# Altium PCB TDA7850.PcbDoc
Units mm, origin at the board's own origin, x right, y up, seen from the top; angles counter-clockwise.
Board outline 60.58 x 24.89 mm, 2 copper layers (Top Layer, Bottom Layer); 17 components, 18 nets, 76 pads, 0 vias.
Unrouted connection lines stored in the file: 13.
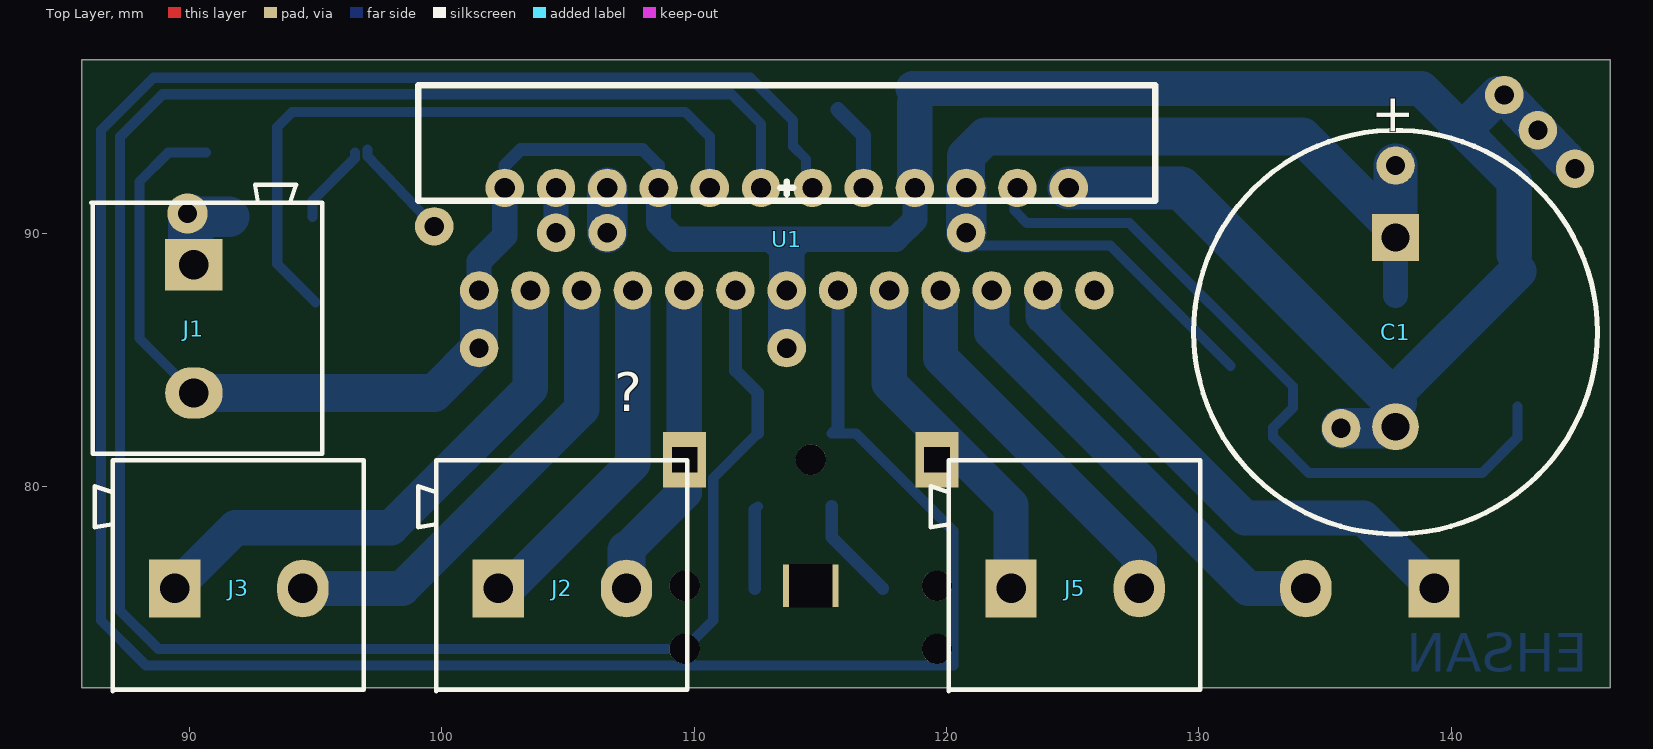
[diagram p0: Top Layer view]
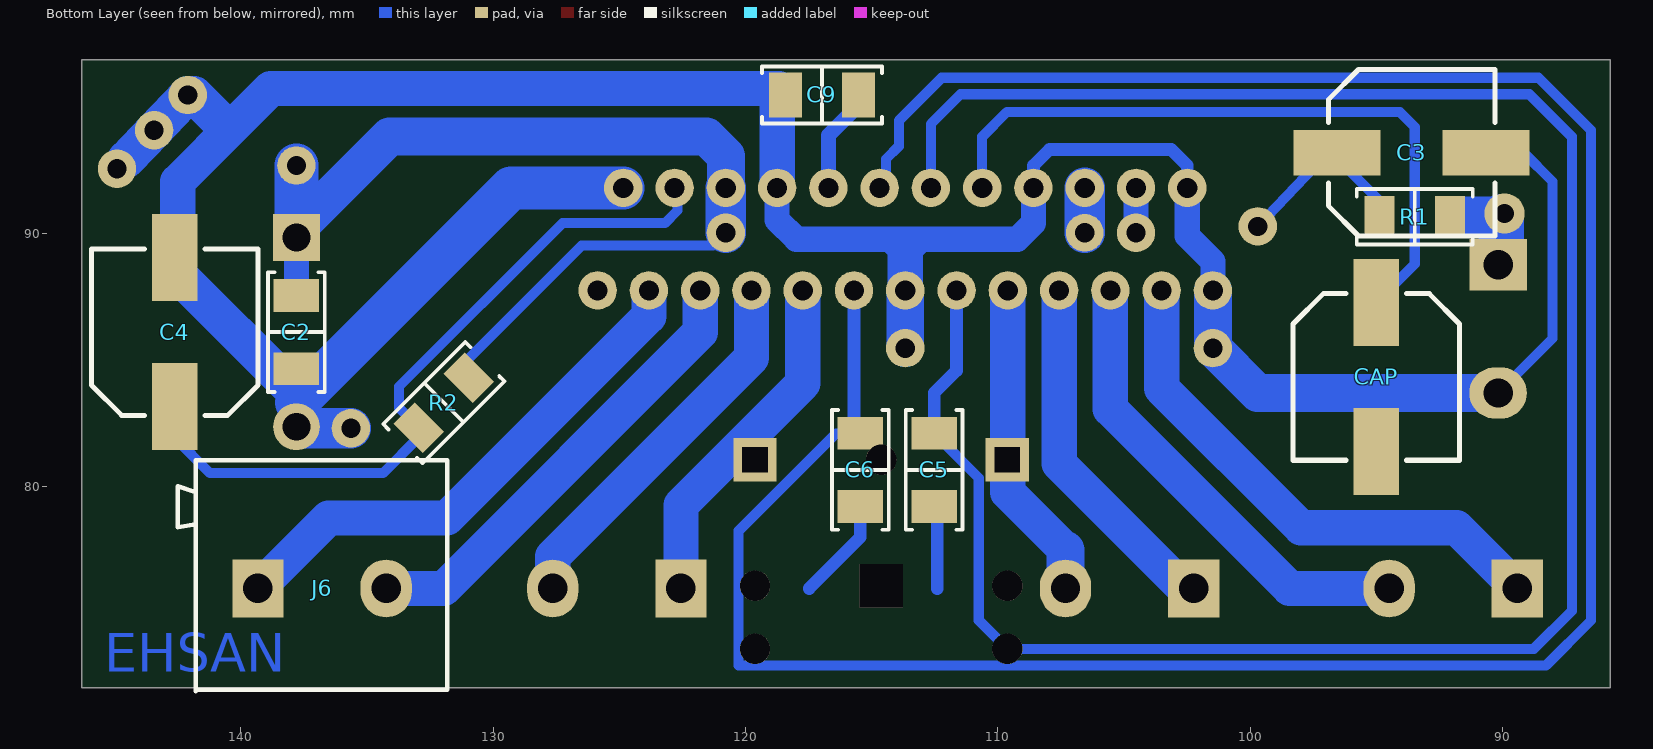
[diagram p1: Bottom Layer view, seen from below]
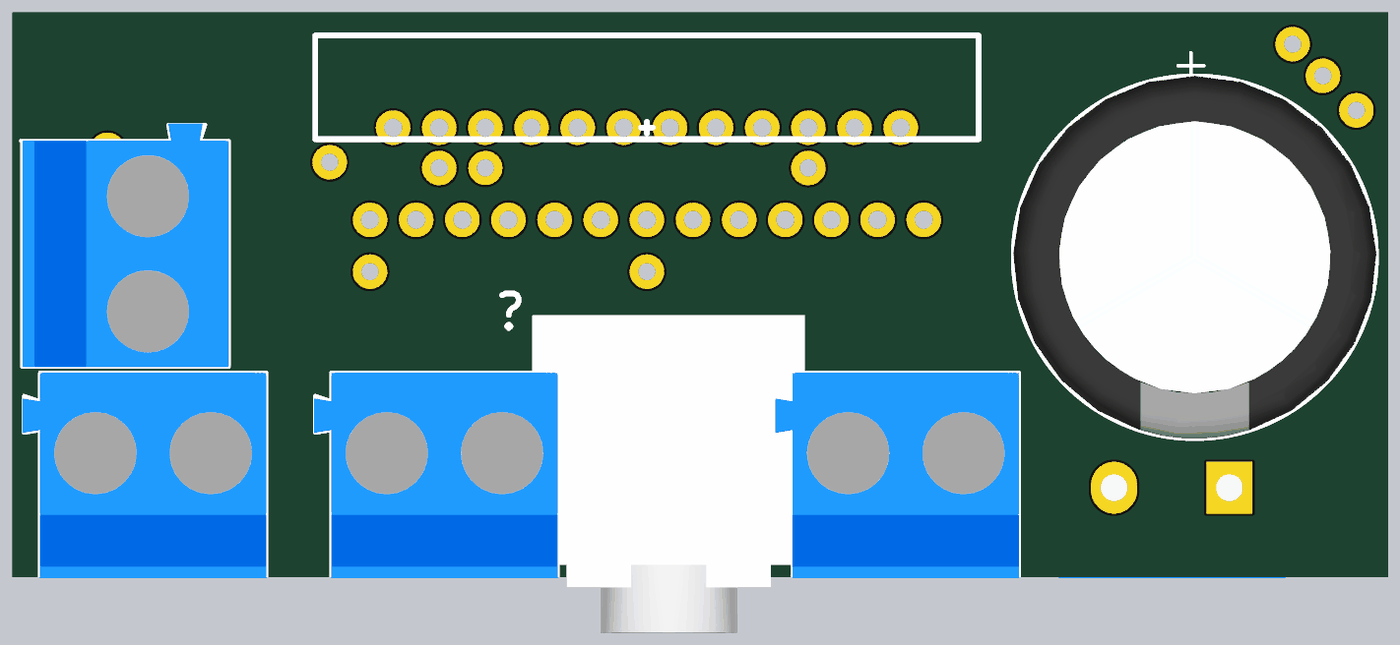
[diagram p2: 3D render of the assembled board from above, using the file's embedded part models]
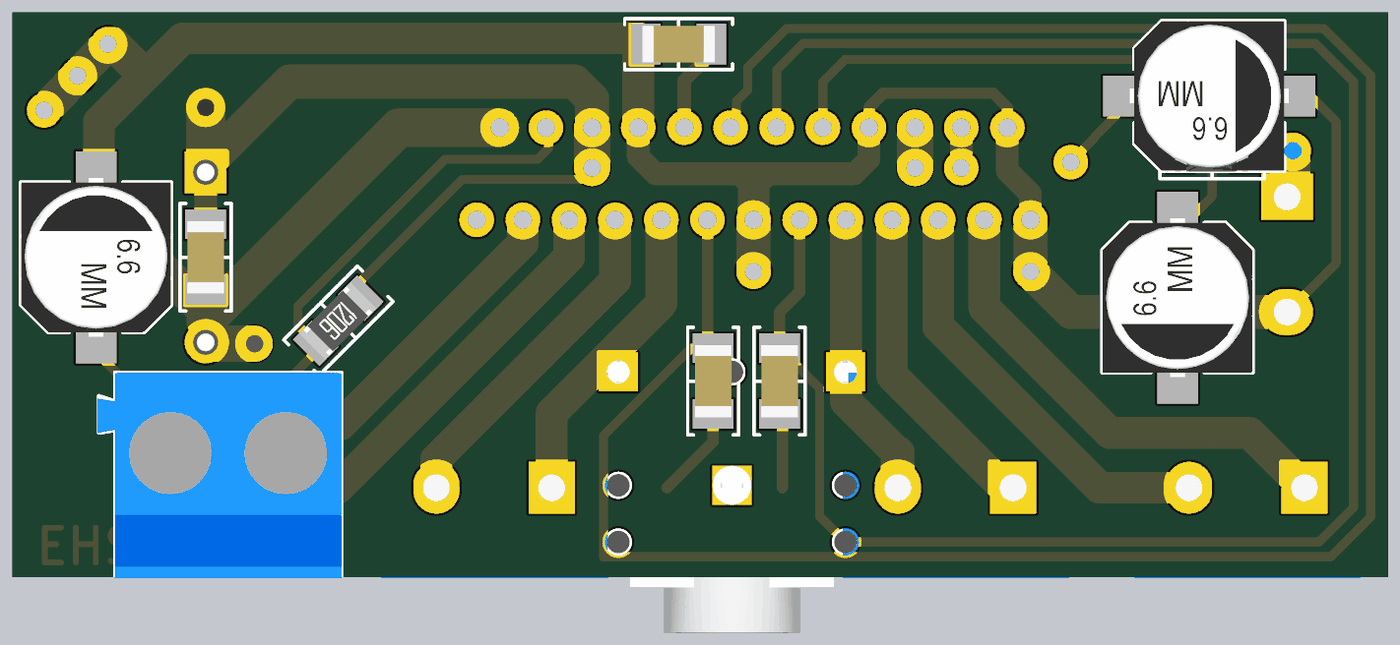
[diagram p3: 3D render of the assembled board from below, using the file's embedded part models]

## Layer stack, top to bottom
Top Solder: solder mask 0.0102, Solder Resist, Dk 3.5
Top Layer: signal copper 0.0356
Dielectric1: dielectric 0.32, FR-4, Dk 4.8
Bottom Layer: signal copper 0.0356
Bottom Solder: solder mask 0.0102, Solder Resist, Dk 3.5

## Board outline
85.725,72.009 146.304,72.009 146.304,96.901 85.725,96.901

## Design rules (kind name [scope] priority, off if disabled: settings)
Clearance [All] p1: gap=0.254 ignorepadtopadclearanceinfootprint=FALSE except(0: Arc-Hole Track-Hole SMDPad-Hole THPad-Hole Via-Hole Fill-Hole Poly-Hole Region-Hole Text-Hole)
PolygonConnect [All] p1: connectstyle=Relief reliefconductorwidth=0.254 reliefentries=4 polygonreliefangle="90 Angle" airgapwidth=0.254
RoomDefinition AF [InComponentClass('AF')] p1: confinementstyle=ConfineIn formatcopy=TRUE lockcomponents=FALSE outline 147.447,73.533 161.925,73.533 161.925,89.154 147.447,89.154
RoutingVias [All] p1: holewidth=0.711 width=1.27 viastyle="Through Hole" minholewidth=0.711 minwidth=1.27 maxholewidth=0.711 maxwidth=1.27
SolderMaskExpansion [All] p1: expansion=0.102
Width [All] p1: maxlimit=0.4 minlimit=0.4 preferedwidth=0.4
30 further rules are at their usual default settings.

## Components (designator, comment, footprint, x,y, rotation, side; value= is the part's Value field where it differs from the comment)
? "3.5 mm Right-Angle Stereo Jack, 4 Pin PCB Mount, Isolated Ground" "3.5mm jack" 114.62,76.052 r90 top
C1 "2000uF-16V" Cap_5_(7.5mm) 137.795,86.106 r270 top value=10uF
C2 "100nF" "CAP 1206/3216" 137.795,86.106 r90 bottom value=0.1uF
C3 "1uF" "CAP ALUM 6.6MM" 93.599,93.218 r180 bottom value=10uF
C4 "1uF" "CAP ALUM 6.6MM" 142.621,86.106 r90 bottom value=10uF
C5 "220nF" "CAP 1206/3216" 112.522,80.645 r90 bottom value=0.1uF
C6 "220Nf" "CAP 1206/3216" 115.443,80.645 r90 bottom value=0.1uF
C9 "470NF" "CAP 1206/3216" 116.967,95.504 r180 bottom value=0.1uF
CAP "1UF" "CAP ALUM 6.6MM" 94.996,84.328 r270 bottom value=10uF
J1 "2 Pin" Socket_Blue_2 90.17,86.233 r270 top
J2 "2 Pin" Socket_Blue_2 104.775,75.946 r0 top
J3 "2 Pin" Socket_Blue_2 91.948,75.946 r0 top
J5 "2 Pin" Socket_Blue_2 125.095,75.946 r0 top
J6 "2 Pin" Socket_Blue_2 136.779,75.946 r180 bottom
R1 "10k" "RES 1206/3216" 93.472,90.678 r0 bottom value=1K
R2 "47k" "RES 1206/3216" 131.953,83.312 r315 bottom value=1K
U1 "TDA7388" TDA7388 113.665,89.916 r0 top

## Footprints (in the part's own frame and the unit in brackets; to place one, negate y for a bottom-side part, rotate by r counter-clockwise, add the part's x,y. Pads: shape width x height; smd on the part's side, far side on the other; paste and mask are expansions set on the pad)
"3.5mm jack" [mm]
  round 1.2 hole 1.2 unplated: 1(-2.5,5) 1(-2.5,-5) 1(0,5) 1(0,-5) 1(5,0)
  rect 1.7x2.2 / inner rect 1.524x1.524 / far side rect 1.722x1.722 hole 1.7 square: 1(0,0)
  rect 2.2x1.7 / inner rect 1.524x1.524 / far side rect 1.722x1.722 hole 1 square: 2(5,-5) 3(5,5)
  body extent -6.55,-6 7.5,6, height 6
"CAP 1206/3216" [mm] "Chip Capacitor, 2-Leads, Body 3.25x1.60mm, IPC Medium Density"
  rect 1.3x1.8 smd: 1(-1.45,0) 2(1.45,0)
  silkscreen extent -2.37,-1.12 2.37,1.12, body extent -1.6,-0.81 1.6,0.81, height 1.62
"CAP ALUM 6.6MM" [mm] "Aluminum Electrolytic Capacitor, Body 6.60x6.60x7.70mm, IPC Low Density"
  rect 3.45x1.8 smd: 1(-2.95,0) 2(2.95,0)
  silkscreen extent -3.3,-3.3 3.3,3.3, body extent -3.5,-3.3 3.5,3.3, height 7.7
Cap_5_(7.5mm) [mm] "Capacitor, Electrolytic, Radial; Body 16 x 25 mm (Dia.xH typ); Pin Spacing 7.5 mm (typ)"
  rect 1.85x1.85 hole 1.1: 1(-3.75,0)
  round 1.85 hole 1.1: 2(3.75,0)
  silkscreen extent -8,-8 8,8, body extent -8,-8 8,8, height 41
"RES 1206/3216" [mm] "Chip Resistor, 2-Leads, Body 3.13x1.55mm, IPC Medium Density"
  rect 1.2x1.65 smd: 1(-1.4,0) 2(1.4,0)
  silkscreen extent -2.3,-1.1 2.3,1.1, body extent -1.58,-0.8 1.62,0.8, height 0.6
Socket_Blue_2 [mil]
  rect 80x90 hole 46: 1(-100,0)
  oval 80x90 hole 46: 2(100,0)
  silkscreen extent -225,-160 195,200, body extent -227,-157 195,200, height 493
TDA7388 [mil]
  round 60 hole 31.5: 1(-480,-85) 2(-440,75) 3(-400,-85) 4(-360,75) 5(-320,-85) 6(-280,75) 7(-240,-85) 8(-200,75) 9(-160,-85) 10(-120,75) 11(-80,-85) 12(-40,75) 13(0,-85) 14(40,75) 15(80,-85) 16(120,75) 17(160,-85) 18(200,75) 19(240,-85) 20(280,75) 21(320,-85) 22(360,75) 23(400,-85) 24(440,75) 25(480,-85)
  silkscreen extent -575,55 575,235

## Part data
?: library part "3.5mm Jack", Package=PIN-4, Availability=Good, DeviceSetName=SJ1-3524NG, GateName_1=G$1, LibraryName=SJ1-3524NG, MF=CUI, MP=SJ1-3524NG, Price="0.55 USD", SymbolName_1=SJ1-3524NG
C1 C3 C4 CAP: library part "Polarised Capacitor", "SMT Polarised Capacitor"
C2 C5 C6 C9: library part Capacitor, "SMT Capacitor"
R1 R2: library part Resistor, "SMT Resistor"

## Free pads (board coordinates)
  round 1.524 hole 0.762: 0(120.777,90.043) 2(104.521,90.043) 3(99.695,90.297) 5(101.473,85.471) 5(113.665,85.471) 5(113.665,85.471) 6(135.636,82.296) 6(137.795,92.71) 6(142.101,95.504) 6(143.435,94.107) 6(144.907,92.583)
  round 1.6 hole 0.762: 1(89.916,90.805)
  round 1.5 hole 0.762: 1(106.553,90.043)

## Nets (pads, with @x,y where several pads share a name; then routed paths per layer and width w, separated by ;. In a path a pad name is that pad's centre, name@x,y a point inside that pad or via, vN(x,y) a via of type N, cw(c..) or ccw(c..) an arc to the next point about the centre after c; other vN are vias at no path point)
GND: ?.1 C1.2 C2.1 C3.2 C4.2 C9.1 CAP.2 J1.2 pad.5 pad.6@135.636,82.296 pad.6@142.101,95.504 pad.6@143.435,94.107 pad.6@144.907,92.583 U1.1 U1.2 U1.8 U1.13 U1.18 U1.24 | length 122.9
  Bottom Layer w0.4: J1.2 88.011,85.852 88.011,92.075 89.154,93.218 C3.2 ; C9.1@118.671,95.758 C9.1 C9.1@118.745,95.176 ; C1.2@137.735,82.296 C1.2 137.795,83.312 137.795,83.693 ; C4.2@142.494,89.183 C4.2 ; pad.6@144.526,92.964 pad.6@144.907,92.583
  Bottom Layer w0.5: U1.2 102.489,92.71 103.124,93.345 107.95,93.345 108.585,92.71 U1.8 ; C4.2@142.621,88.519 C4.2
  Bottom Layer w1: U1.1 101.473,88.9 102.489,89.916 U1.2 ; U1.8 108.585,90.424 109.22,89.789 113.03,89.789 113.665,89.154 114.3,89.789 117.983,89.789 118.745,90.551 U1.18
  Bottom Layer w1.4: U1.13 113.665,89.154 ; C9.1@118.671,95.758 138.811,95.758 139.827,94.742 140.081,94.488 142.494,92.075 C4.2@142.494,89.183 ; U1.18 C9.1@118.745,95.176
  Bottom Layer w1.5: J1.2 99.695,83.693 101.473,85.471 U1.1 ; pad.5@113.665,85.471 U1.13 ; 137.795,83.693 C4.2@142.621,88.519 ; 140.843,94.488 141.859,95.504 142.101,95.504 143.435,94.107 pad.6@144.526,92.964
  Bottom Layer w1.6: pad.6@135.636,82.296 C1.2@137.735,82.296
  Bottom Layer w1.7: U1.24 129.286,91.821 137.795,83.312
Net?_2: ?.2 C6.1 | length 4.1
  Bottom Layer w0.5: C6.1 115.443,77.978 117.475,75.946
Net?_3: ?.3 C5.1 | length 3.3
  Bottom Layer w0.4: C5.1@112.395,79.068 C5.1
  Bottom Layer w0.5: 112.395,75.946 C5.1@112.395,79.068
NetC1_1: C1.1 C2.2 J1.1 pad.0 pad.1 pad.6@137.795,92.71 R1.1 R2.1 U1.6 U1.20 | length 45.2
  Bottom Layer w0.4: pad.1@89.916,90.805 pad.1@90.043,90.678 ; pad.0 121.285,89.535 126.492,89.535 R2.1@131.255,84.772 ; C1.1 C1.1@137.795,90.17
  Bottom Layer w1: C2.2 C1.1
  Bottom Layer w1.5: U1.20 120.777,93.091 121.539,93.853 134.112,93.853 C1.1@137.795,90.17
  Bottom Layer w1.6: pad.1@90.043,90.678 R1.1@91.567,90.678 ; pad.1@106.553,90.043 U1.6 ; pad.0 U1.20
  Bottom Layer w1.74: C1.1@137.795,90.17 pad.6@137.795,92.71
  Bottom Layer w1.8: pad.1@90.043,90.678 90.043,88.9 J1.1
NetC3_1: C3.1 pad.2 pad.3 R1.2 U1.4 | length 9.5
  Bottom Layer w0.4: R1.2 94.872,91.316 96.549,92.993 C3.1 ; C3.1@97.057,93.345 97.057,93.062 pad.3 pad.3@99.822,89.913
  Bottom Layer w1: pad.2 U1.4
NetC4_1: C4.1 R2.2 U1.22 | length 28.9
  Bottom Layer w0.4: U1.22@122.691,91.431 122.691,90.923 123.19,90.424 127.254,90.424 133.731,83.947 133.731,83.11 R2.2 132.943,81.941 134.366,80.518 141.224,80.518 142.621,81.915 C4.1
NetC5_2: C5.2 U1.11 U1.12 | length 86.4
  Bottom Layer w0.4: U1.11@111.633,87.503 U1.11 ; C5.2 110.755,80.328 110.755,74.687 109.62,73.552 88.754,73.552 87.249,75.057 87.249,93.853 88.931,95.535 111.475,95.535 112.649,94.361 U1.12
  Bottom Layer w0.5: U1.11@111.633,87.249 111.633,84.582 112.522,83.693 C5.2
NetC6_2: C6.2 U1.14 U1.15 | length 103.5
  Bottom Layer w0.4: U1.14@114.427,92.075 114.427,92.964 113.919,93.472 113.919,94.488 112.218,96.189 88.569,96.189 86.487,94.107 86.487,74.676 88.265,72.898 120.269,72.898 120.269,78.232 116.406,82.095 C6.2 C6.2@115.697,82.349
  Bottom Layer w0.5: U1.14@114.427,92.075 U1.14 ; C6.2@115.697,82.349 U1.15
NetC9_2: C9.2 U1.16 | length 3.5
  Bottom Layer w0.6: C9.2@115.697,94.922 116.713,93.906 U1.16
NetCAP_1: CAP.1 U1.10 | length 27.4
  Bottom Layer w0.4: CAP.1 93.472,88.802 93.472,94.234 94.069,94.831 109.639,94.831 110.617,93.853 U1.10
NetJ2_1: J2.1 U1.7 | length 14.2
  Bottom Layer w0.4: J2.1 J2.1@102.616,75.946
  Bottom Layer w1.4: J2.1@102.616,75.946 107.569,80.899 U1.7
NetJ2_2: J2.2 U1.9 | length 12.8
  Bottom Layer w1.4: 107.315,77.47 109.601,79.756 U1.9
  Bottom Layer w1.5: J2.2 107.315,77.47
NetJ3_1: J3.1 U1.5 | length 21.3
  Bottom Layer w1.4: J3.1 91.821,78.359 97.983,78.359 103.505,83.881 103.505,87.757
NetJ3_2: J3.2 U1.3 | length 18.7
  Bottom Layer w1.4: J3.2 98.425,75.946 105.537,83.058 105.537,87.757
NetJ5_1: J5.1 U1.17 | length 13.8
  Bottom Layer w1.4: U1.17 117.729,84.074 122.555,79.248 J5.1
NetJ5_2: J5.2 U1.19 | length 15.1
  Bottom Layer w1.4: U1.19 119.761,85.09 127.635,77.216 J5.2
NetJ6_1: J6.1 U1.23 | length 21
  Bottom Layer w1.4: U1.23 123.825,86.741 131.826,78.74 136.525,78.74 J6.1
NetJ6_2: J6.2 U1.21 | length 18.1
  Bottom Layer w1.4: U1.21@121.793,87.503 121.793,86.106 131.953,75.946 J6.2
pads on no net: U1.25

## Other copper
Bottom Layer:
  rectangle net GND: 112.141,89.662 114.935,90.297
  text "EHSAN" at 145.415,72.644 h1.52

## Silkscreen, mask and mechanical layers (free items; w line width, h text height)
Mechanical 1:
  lines w0.254: 85.725,72.009 85.725,96.901 142.113,96.901 146.304,96.901 146.304,72.009 85.725,72.009

## Text inside footprints (layer, text, board x,y; h text height)
C1: Top Overlay "+" at 137.045,95.581 h1.5 r270